# Altium PCB Juno_Light_Driver-One Driver.PcbDoc
Units mm, origin at the board's own origin, x right, y up, seen from the top; angles counter-clockwise.
Board outline 60 x 60 mm, 2 copper layers (Top Layer, Bottom Layer); 29 components, 61 nets, 192 pads, 12 vias.
Unrouted connection lines stored in the file: 114.
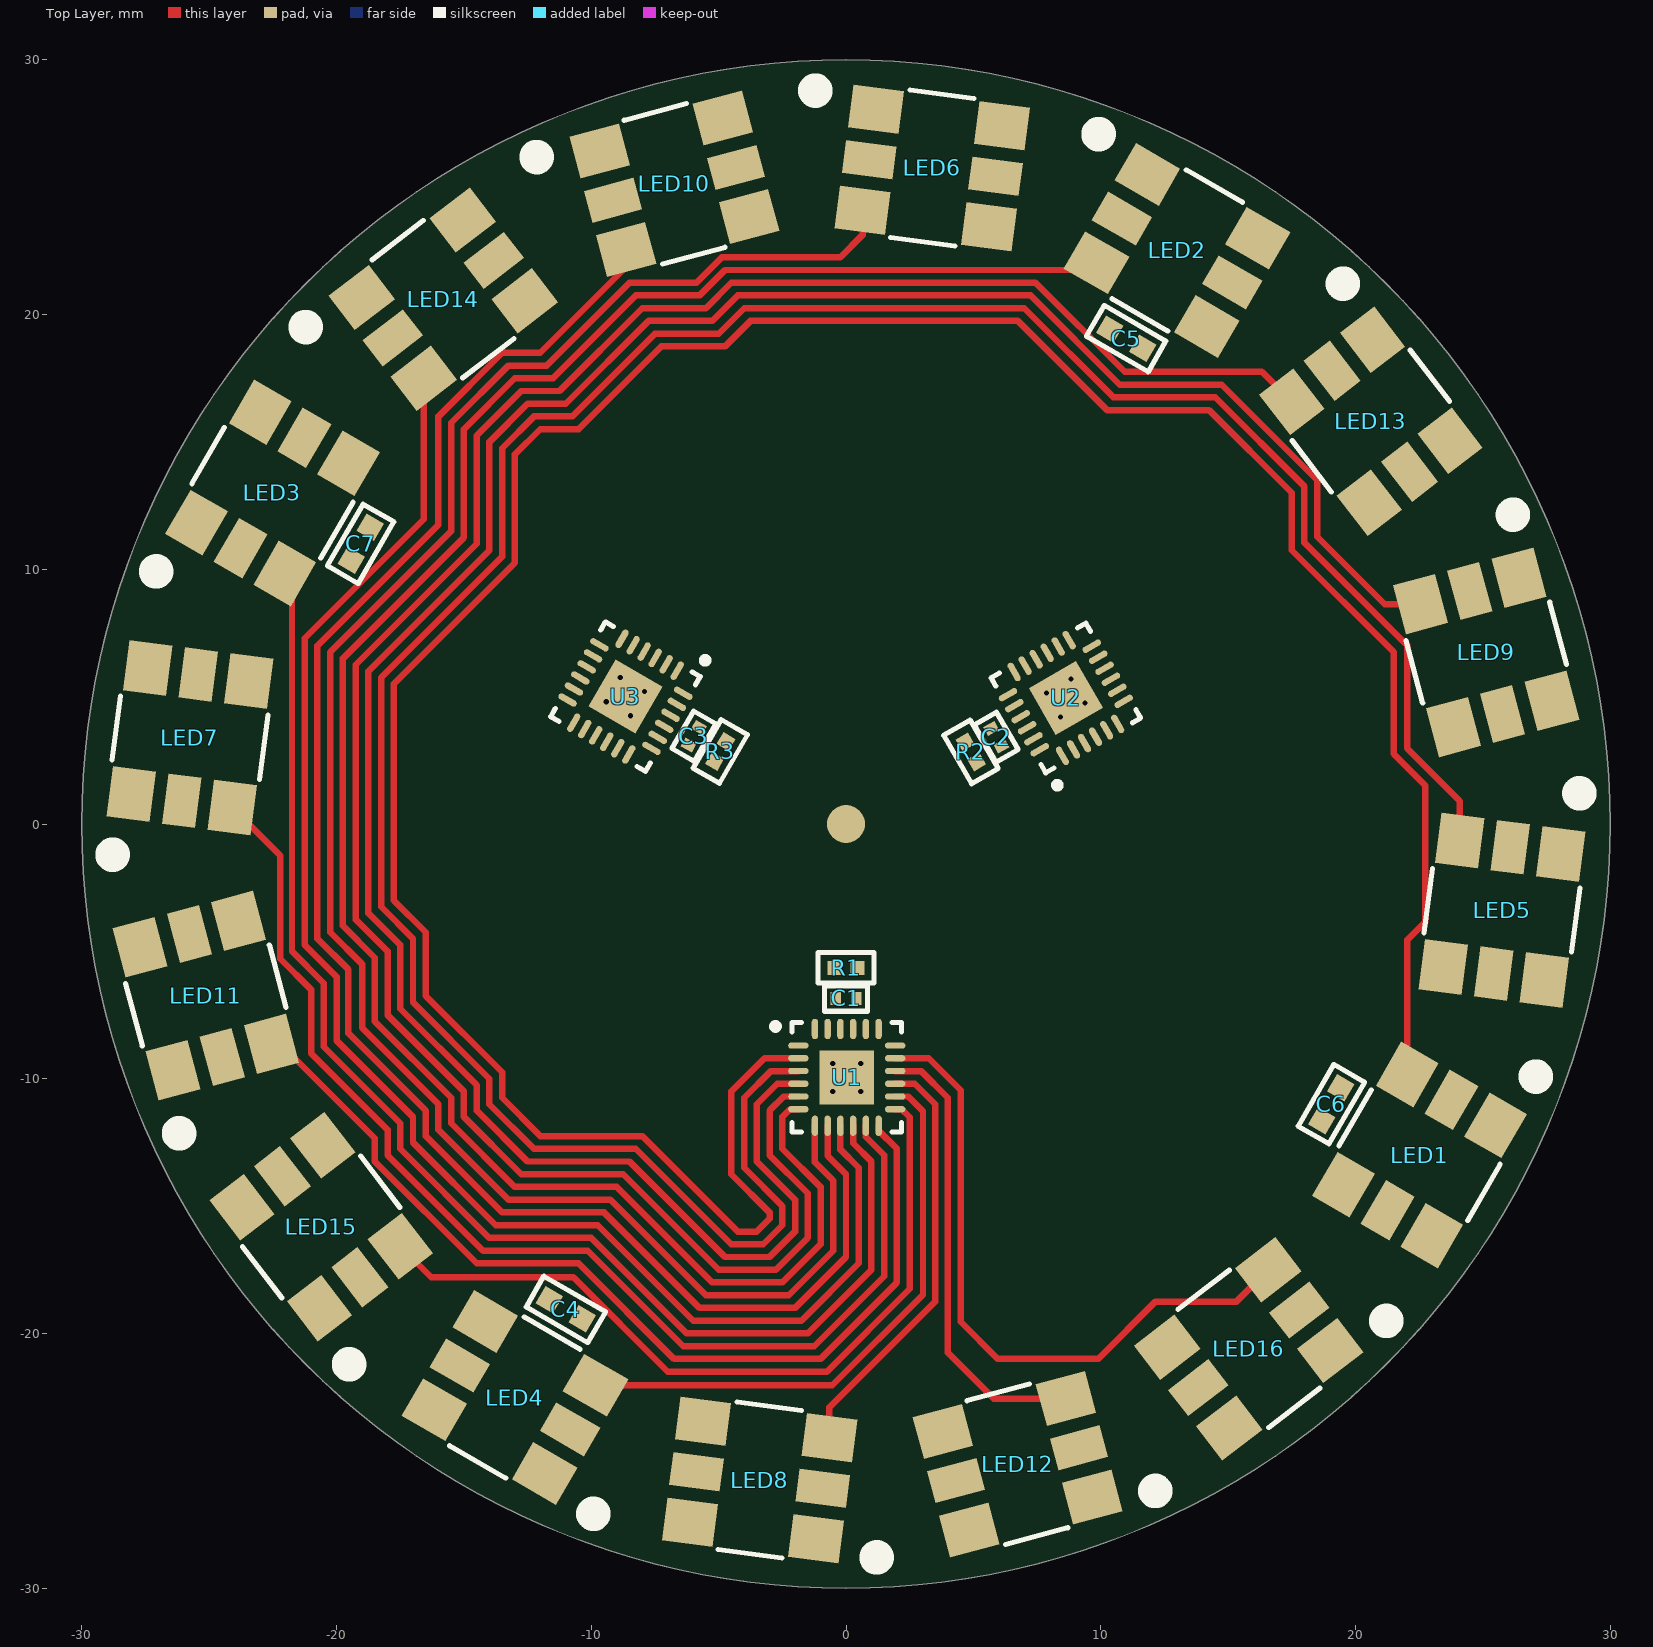
[diagram p0: Top Layer view]
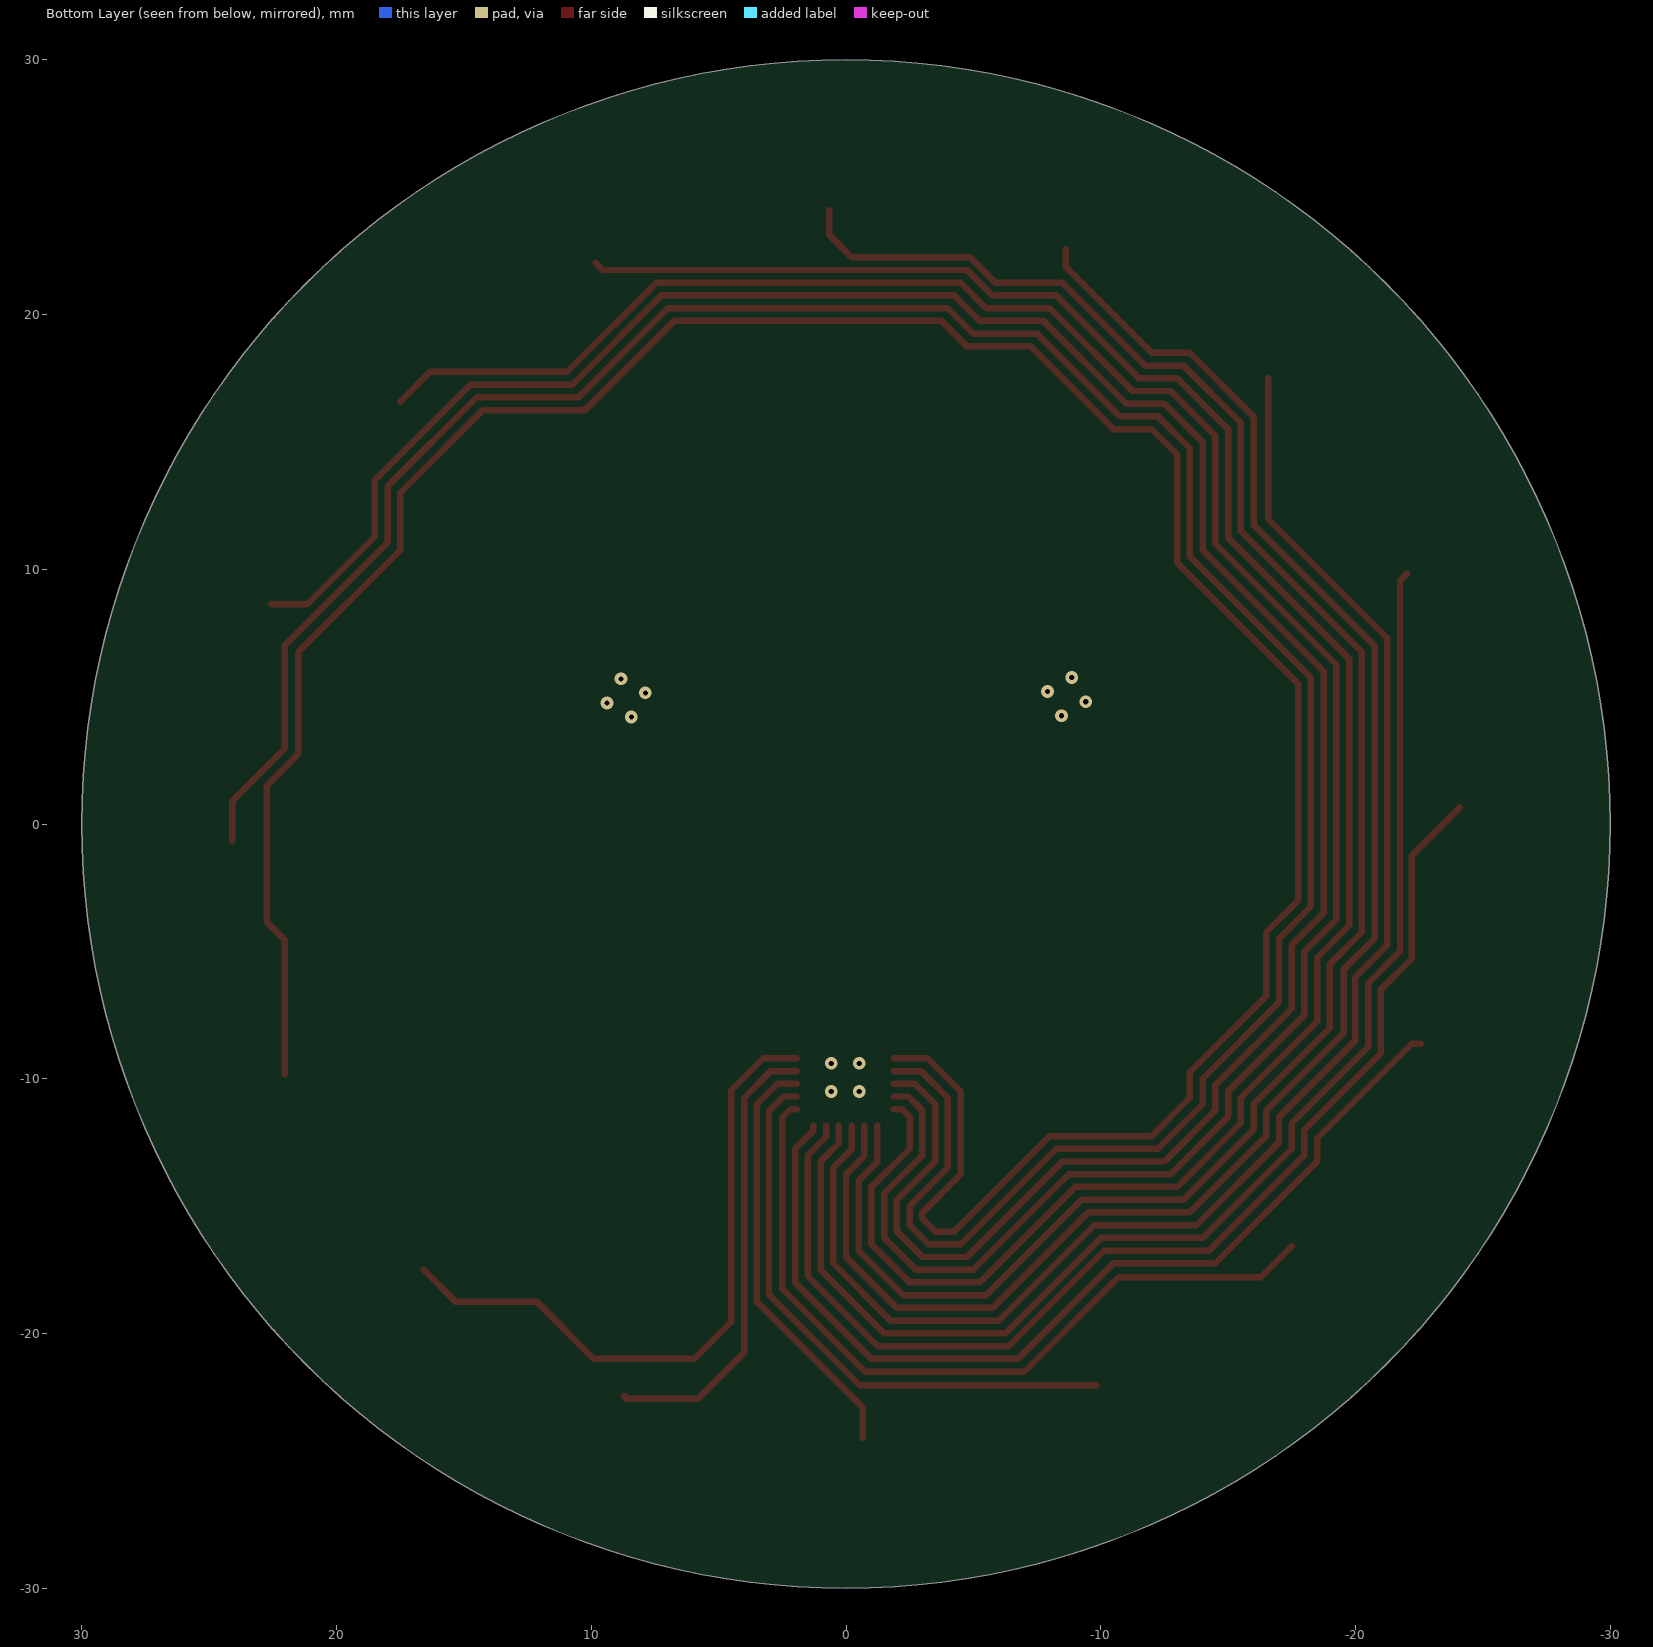
[diagram p1: Bottom Layer view, seen from below]

## Layer stack, top to bottom
Top Solder: solder mask 0.0102, Solder Resist, Dk 3.5
Top Layer: signal copper 0.0356
Dielectric 1: dielectric 0.32, FR-4, Dk 4.8
Bottom Layer: signal copper 0.0356
Bottom Solder: solder mask 0.0102, Solder Resist, Dk 3.5

## Board outline
-30,0 ccw(c0,0) 0,-30 ccw(c0,0) 30,0 ccw(c0,0) 0,30 ccw(c0,0)

## Design rules (kind name [scope] priority, off if disabled: settings)
Clearance [All] p1: gap=0.152 ignorepadtopadclearanceinfootprint=FALSE except(0: Arc-Hole Track-Hole SMDPad-Hole THPad-Hole Via-Hole Fill-Hole Poly-Hole Region-Hole Text-Hole)
MinimumSolderMaskSliver [All] p1 off: minsoldermaskwidth=0.254
PolygonConnect [All] p1: connectstyle=Direct reliefconductorwidth=0.254 reliefentries=4 polygonreliefangle="90 Angle" airgapwidth=0.254
RoutingVias [All] p1: holewidth=0.711 width=1.27 viastyle="Through Hole" minholewidth=0.2 minwidth=0.45 maxholewidth=0.711 maxwidth=1.27
SilkToSilkClearance [All] p1 off: silktosilkclearance=0.254
SilkToSolderMaskClearance [IsPad] p1 off: minsilkscreentomaskgap=0.254 clearancetoexposedcopper=TRUE
SolderMaskExpansion [All] p1: expansion=0.102
Width [All] p1: maxlimit=5.08 minlimit=0.152 preferedwidth=0.254 minimp=50.000000 maximp=50.000000 favimp=50.000000
27 further rules are at their usual default settings.

## Classes and differential pairs
component class "[02] - TRICOLOR LEDS": C4 C5 C6 C7 LED1 LED2 LED3 LED4 LED5 LED6 LED7 LED8 LED9 LED10 LED11 LED12 LED13 LED14 LED15 LED16
component class "[01] - LED DRIVER": C1 C2 C3 R1 R2 R3 U1 U2 U3

## Components (designator, comment, footprint, x,y, rotation, side; value= is the part's Value field where it differs from the comment)
C1 "0.1uF" C0402 0,-6.85 r180 top
C2 "0.1uF" C0402 5.9,3.406 r300 top
C3 "0.1uF" C0402 -5.976,3.45 r60 top
C4 "10uF" C0603 -11,-19.053 r330 top
C5 "10uF" C0603 11,19.053 r150 top
C6 "10uF" C0603 19.053,-11 r60 top
C7 "10uF" C0603 -19.053,11 r240 top
LED1 "SLV6A-FKB-CK1P1G1BB7R3R3" "CREE SLV6A-FKB" 22.517,-13 r240 top
LED2 "SLV6A-FKB-CK1P1G1BB7R3R3" "CREE SLV6A-FKB" 13,22.517 r330 top
LED3 "SLV6A-FKB-CK1P1G1BB7R3R3" "CREE SLV6A-FKB" -22.517,13 r60 top
LED4 "SLV6A-FKB-CK1P1G1BB7R3R3" "CREE SLV6A-FKB" -13,-22.517 r150 top
LED5 "SLV6A-FKB-CK1P1G1BB7R3R3" "CREE SLV6A-FKB" 25.755,-3.391 r262.5 top
LED6 "SLV6A-FKB-CK1P1G1BB7R3R3" "CREE SLV6A-FKB" 3.391,25.755 r352.5 top
LED7 "SLV6A-FKB-CK1P1G1BB7R3R3" "CREE SLV6A-FKB" -25.755,3.391 r82.5 top
LED8 "SLV6A-FKB-CK1P1G1BB7R3R3" "CREE SLV6A-FKB" -3.391,-25.755 r172.5 top
LED9 "SLV6A-FKB-CK1P1G1BB7R3R3" "CREE SLV6A-FKB" 25.135,6.735 r285 top
LED10 "SLV6A-FKB-CK1P1G1BB7R3R3" "CREE SLV6A-FKB" -6.735,25.135 r15 top
LED11 "SLV6A-FKB-CK1P1G1BB7R3R3" "CREE SLV6A-FKB" -25.135,-6.735 r105 top
LED12 "SLV6A-FKB-CK1P1G1BB7R3R3" "CREE SLV6A-FKB" 6.735,-25.135 r195 top
LED13 "SLV6A-FKB-CK1P1G1BB7R3R3" "CREE SLV6A-FKB" 20.609,15.814 r307.5 top
LED14 "SLV6A-FKB-CK1P1G1BB7R3R3" "CREE SLV6A-FKB" -15.814,20.609 r37.5 top
LED15 "SLV6A-FKB-CK1P1G1BB7R3R3" "CREE SLV6A-FKB" -20.609,-15.814 r127.5 top
LED16 "SLV6A-FKB-CK1P1G1BB7R3R3" "CREE SLV6A-FKB" 15.814,-20.609 r217.5 top
R1 "18K" R0402 0,-5.65 r0 top
R2 "18K" R0402 4.9,2.829 r120 top
R3 "18K" R0402 -4.936,2.85 r240 top
U1 "LED1642GWQTR" QFN24 0.03,-9.948 r0 top
U2 "LED1642GWQTR" QFN24 8.63,4.948 r120 top
U3 "LED1642GWQTR" QFN24 -8.66,5 r240 top

## Footprints (in the part's own frame and the unit in brackets; to place one, negate y for a bottom-side part, rotate by r counter-clockwise, add the part's x,y. Pads: shape width x height; smd on the part's side, far side on the other; paste and mask are expansions set on the pad)
C0402 [mm] "Chip Capacitor, 2-Leads, Body 1.00x0.50mm, IPC Medium Density"
  rect 0.4x0.5 smd: 1(-0.4,0) 2(0.4,0)
  silkscreen extent -0.85,-0.5 0.85,0.5, body extent -0.52,-0.27 0.53,0.28, height 0.55
C0603 [mm] "Chip Capacitor, 2-Leads, Body 1.60x0.80mm, IPC Medium Density"
  rect 0.8x0.8 smd: 1(-0.75,0) 2(0.75,0)
  silkscreen extent -1.4,-0.7 1.4,0.7, body extent -0.85,-0.45 0.85,0.45, height 0.9
"CREE SLV6A-FKB" [mm]
  rect 2x1.7 smd: 1(-2.5,2) 3(-2.5,-2) 4(2.5,-2) 6(2.5,2)
  rect 2x1.3 smd: 2(-2.5,0) 5(2.5,0)
  silkscreen extent -5.13,-2.92 1.27,2.92, body extent -2.8,-2.8 2.8,2.8, height 2.6
QFN24 [mm] "QFN, 24-Leads, Body 3.93x3.93mm, Pitch 0.50mm, Thermal Pad 2.13x2.13mm, IPC High Density"
  oval 0.8x0.25 smd: 1(-1.9,1.25) 2(-1.9,0.75) 3(-1.9,0.25) 4(-1.9,-0.25) 5(-1.9,-0.75) 6(-1.9,-1.25) 13(1.9,-1.25) 14(1.9,-0.75) 15(1.9,-0.25) 16(1.9,0.25) 17(1.9,0.75) 18(1.9,1.25)
  oval 0.25x0.8 smd: 7(-1.25,-1.9) 8(-0.75,-1.9) 9(-0.25,-1.9) 10(0.25,-1.9) 11(0.75,-1.9) 12(1.25,-1.9) 19(1.25,1.9) 20(0.75,1.9) 21(0.25,1.9) 22(-0.25,1.9) 23(-0.75,1.9) 24(-1.25,1.9)
  rect 2.13x2.13 smd: 25(0,0)
  silkscreen extent -2.92,-2.15 2.15,2.15, body extent -2.05,-2.05 2.05,2.05, height 1
R0402 [mm] "Chip Resistor, 2-Leads, Body 1.00x0.50mm, IPC Medium Density"
  rect 0.55x0.55 smd: 1(-0.45,0) 2(0.45,0)
  silkscreen extent -1.1,-0.6 1.1,0.6, body extent -0.53,-0.28 0.53,0.28, height 0.4

## Part data
C1 C2 C3: library part CL05B104KO5NNNC, "Cap Ceramic 0.1uF 16V X7R 10% SMD 0402 125C C/T", Capacitance=100nF, Case/Package=0402, Case Code (Metric)=1005, Dielectric=X7R, Manufacturer 1=Samsung, Max Operating Temperature=125°C, Min Operating Temperature=-55°C, Package Quantity=1, Supplier Part Number 1=1276-1001-6-ND, Tolerance=10%, Voltage=16V, Case Code (Imperial)=0402, ComponentLink1Description=https://datasheet.ciiva.com/16208/cl05b104kq5nnnc-16208343.pdf, ComponentLink1URL=https://datasheet.ciiva.com/16208/cl05b104kq5nnnc-16208343.pdf, ComponentLink2Description=https://datasheet.ciiva.com/26920/getdatasheetpartid-359683-26920169.pdf, ComponentLink2URL=https://datasheet.ciiva.com/26920/getdatasheetpartid-359683-26920169.pdf, ComponentLink3Description=https://datasheet.ciiva.com/26309/mlcc-catalogdownload2013-eng-26309003.pdf, ComponentLink3URL=https://datasheet.ciiva.com/26309/mlcc-catalogdownload2013-eng-26309003.pdf, ComponentLink4Description=https://datasheet.ciiva.com/29198/458718-da-01-en-vs-kondensator-0402-29198423.pdf, ComponentLink4URL=https://datasheet.ciiva.com/29198/458718-da-01-en-vs-kondensator-0402-29198423.pdf, Contact Plating=Tin, Depth=0.5mm, Description 1="Cap Ceramic 0.1uF 16V X7R 10% SMD 0402 125C Paper T/R", Height=0.5mm, Lead Free="Lead Free", Length=1mm, Manufacturer Part Number 1=CL05B104KO5NNNC, Material=Ceramic, Mount="Surface Mount", Packaging="Tape and Reel", Pricing 1="1=0.1, 10=0.018, 100=0.0081, 500=0.0058, 1000=0.0045, 2500=0.0041, 5000=0.0038 (USD)", Radiation Hardening=No, Stock 1=9531, Supplier 1=Digi-Key, Thickness=0.022inch, Voltage Rating=16V, Voltage Rating (DC)=16V, Width=0.02inch
C4 C5 C6 C7: library part GRM188R61A106KE69D, "Cap Ceramic 10uF 10V X5R 10% SMD 0603 85C Paper T/R", Case/Package=0603, Case Code (Metric)=1608, Dielectric=X5R, Manufacturer=Murata, Max Operating Temperature=85°C, Min Operating Temperature=-55°C, Supplier Part Number 1=490-10474-1-ND, Tolerance=10%, Voltage=10V, Capacitance=10uF, Case Code (Imperial)=0603, Depth=0.8mm, Description 1="Cap Ceramic 10uF 10V X5R 10% SMD 0603 85C Paper T/R", Height=0.8mm, Lead Free="Lead Free", Length=1.6mm, Manufacturer Part Number 1=GRM188R61A106KE69D, Mount="Surface Mount", Packaging="Tape and Reel", Pricing="1=0.22, 10=0.149, 100=0.0754, 500=0.05158, 1000=0.04563 (USD)", REACH SVHC="No SVHC", Stock=40000, Supplier 1=Digi-Key, Thickness=0.037inch, Voltage Rating=10V, Voltage Rating (DC)=10V, Width=0.031inch
LED1 LED2 LED3 LED4 LED5 LED6 LED7 LED8 LED9 LED10 LED11 LED12 LED13 LED14 LED15 LED16: "LED RGB 6PLCC SMD", Case/Package=SMD/SMT, Color=Blue,Green,Red, Forward Voltage=3.2V, Manufacturer=Cree, Supplier Part Number 1=SLV6A-FKB-CK1P1G1BB7R3R3CT-ND, Test Current=20mA, Dominant Wavelength=470nm, Height=2.6mm, Length=5.5mm, Luminous Intensity=420mcd, Manufacturer Part Number=SLV6A-FKB-CK1P1G1BB7R3R3, Mount="Surface Mount", Packaging="Tape and Reel", Pricing 1="1=0.42, 10=0.395, 100=0.3648, 1000=0.32631 (USD)", Stock 1=101474, Supplier 1=Digi-Key, Width=5.3mm
R1 R2 R3: library part CRGCQ0402F18K, Manufacturer="TE Connectivity", Supplier Part Number 1=A129642CT-ND, Manufacturer Part Number=CRGCQ0402F18K, Pricing 1="1=0.1, 10=0.022, 100=0.009, 1000=0.00406, 2500=0.00352, 5000=0.00291 (USD)", Stock 1=128806, Supplier 1=Digi-Key
U1 U2 U3: "IC LED DRIVER LIN DIM 40MA 24QFN", Case/Package=QFN, Frequency=30MHz, Manufacturer=STMicroelectronics, Max Input Voltage=5.5V, Max Operating Temperature=85°C, Max Output Current=50mA, Max Output Voltage=19V, Max Supply Current=10mA, Min Input Voltage=3V, Min Operating Temperature=-40°C, Nominal Input Voltage (DC)=3.3V, Output Current per Channel=40mA, Package Quantity=4000, Supplier Part Number 1=497-14029-1-ND, ComponentLink1Description=http://www.st.com/content/ccc/resource/technical/document/datasheet/ae/9b/e2/7c/7d/66/41/08/DM00080246.pdf/files/DM00080246.pdf/jcr:content/translations/en.DM00080246.pdf?src-supplier=Digi-Key, ComponentLink1URL=http://www.st.com/content/ccc/resource/technical/document/datasheet/ae/9b/e2/7c/7d/66/41/08/DM00080246.pdf/files/DM00080246.pdf/jcr:content/translations/en.DM00080246.pdf?src-supplier=Digi-Key, ComponentLink2Description=https://www.verical.com/server-webapp/html/getDatasheet?partID=789956&src-supplier=Verical, ComponentLink2URL=https://www.verical.com/server-webapp/html/getDatasheet?partID=789956&src-supplier=Verical, ComponentLink3Description=http://www.st.com/web/en/resource/technical/document/datasheet/DM00080246.pdf?src-supplier=Avnet, ComponentLink3URL=http://www.st.com/web/en/resource/technical/document/datasheet/DM00080246.pdf?src-supplier=Avnet, Dimming=PWM, Height=0.95mm, Lead Free="Lead Free", Length=4.15mm, Manufacturer Part Number=LED1642GWQTR, Max Input Voltage (DC)=5.5V, Max Supply Voltage=5.5V, Min Input Voltage (DC)=3V, Min Supply Voltage=3V, Mount="Surface Mount", Nominal Supply Current=10mA, Number of Channels=16, Number of Outputs=16, Number of Pins=24, Operating Supply Voltage=3.3V, Output Current=50mA, Output Voltage=19V, Packaging="Tape and Reel", Pricing 1="1=2.1, 10=1.883, 100=1.5138, 500=1.24372, 1000=1.03052 (USD)", Radiation Hardening=No, REACH SVHC="No SVHC", Stock 1=43999, Supplier 1=Digi-Key, Switching Frequency=30MHz, Width=4.15mm

## Free pads (board coordinates)
  round 1.5 smd: 9(0,0)

## Via types
v1: diameter 0.5, hole 0.2, Top Layer to Bottom Layer, 12 vias

## Nets (pads, with @x,y where several pads share a name; then routed paths per layer and width w, separated by ;. In a path a pad name is that pad's centre, name@x,y a point inside that pad or via, vN(x,y) a via of type N, cw(c..) or ccw(c..) an arc to the next point about the centre after c; other vN are vias at no path point)
+3V3: C1.1 C2.1 C3.1 U1.21 U2.21 U3.21
+VBATT: C4.1 C5.1 C6.1 C7.1 LED1.4 LED1.5 LED1.6 LED2.4 LED2.5 LED2.6 LED3.4 LED3.5 LED3.6 LED4.4 LED4.5 LED4.6 LED5.4 LED5.5 LED5.6 LED6.4 LED6.5 LED6.6 LED7.4 LED7.5 LED7.6 LED8.4 LED8.5 LED8.6 LED9.4 LED9.5 LED9.6 LED10.4 LED10.5 LED10.6 LED11.4 LED11.5 LED11.6 LED12.4 LED12.5 LED12.6 LED13.4 LED13.5 LED13.6 LED14.4 LED14.5 LED14.6 LED15.4 LED15.5 LED15.6 LED16.4 LED16.5 LED16.6
CLK: U1.24 U2.24 U3.24
GND: C1.2 C2.2 C3.2 C4.2 C5.2 C6.2 C7.2 R1.1 R2.1 R3.1 U1.22 U1.25 U2.22 U2.25 U3.22 U3.25
  other v1: -0.52,-10.498 0.58,-10.498 -0.52,-9.398 0.58,-9.398 8.429,4.197 -8.459,4.249 9.381,4.747 -9.412,4.799 7.879,5.149 -7.909,5.201 8.831,5.699 -8.862,5.751
LE: U1.1 U2.1 U3.1
NetR1_2: R1.2 U1.20
NetR2_2: R2.2 U2.20
NetR3_2: R3.2 U3.20
NetU1_19: U1.19 U2.23
NetU2_19: U2.19 U3.23
OUTB0: LED1.1 U3.2
OUTB1: LED5.1 U3.3
OUTB2: LED9.1 U3.4
OUTB3: LED13.1 U3.5
OUTB4: LED2.1 U3.6
OUTB5: LED6.1 U3.7
OUTB6: LED10.1 U3.8
OUTB7: LED14.1 U3.9
OUTB8: LED3.1 U3.10
OUTB9: LED7.1 U3.11
OUTB10: LED11.1 U3.12
OUTB11: LED15.1 U3.13
OUTB12: LED4.1 U3.14
OUTB13: LED8.1 U3.15
OUTB14: LED12.1 U3.16
OUTB15: LED16.1 U3.17
OUTG0: LED1.2 U2.2
OUTG1: LED5.2 U2.3
OUTG2: LED9.2 U2.4
OUTG3: LED13.2 U2.5
OUTG4: LED2.2 U2.6
OUTG5: LED6.2 U2.7
OUTG6: LED10.2 U2.8
OUTG7: LED14.2 U2.9
OUTG8: LED3.2 U2.10
OUTG9: LED7.2 U2.11
OUTG10: LED11.2 U2.12
OUTG11: LED15.2 U2.13
OUTG12: LED4.2 U2.14
OUTG13: LED8.2 U2.15
OUTG14: LED12.2 U2.16
OUTG15: LED16.2 U2.17
OUTR0: LED1.3 U1.2 | length 111.4
  Top Layer w0.254: U1.2 -3.198,-9.198 -4.5,-10.5 -4.5,-13.75 -3,-15.25 -3,-15.5 -3.5,-16 -4.25,-16 -8,-12.25 -12,-12.25 -13.5,-10.75 -13.5,-9.75 -16.5,-6.75 -16.5,-4.25 -17.75,-3 -17.75,5.5 -13,10.25 -13,14.509 -12.009,15.5 -10.5,15.5 -7.25,18.75 -4.75,18.75 -3.75,19.75 6.75,19.75 10.25,16.25 14.25,16.25 17.5,13 17.5,10.75 21.5,6.75 21.5,2.75 22.75,1.5 22.75,-3.838 22.035,-4.553 LED1.3
OUTR1: LED5.3 U1.3 | length 104.9
  Top Layer w0.254: U1.3 -2.948,-9.698 -4,-10.75 -4,-13.5 -2.5,-15 -2.5,-15.75 -3.25,-16.5 -4.5,-16.5 -8.25,-12.75 -12.251,-12.75 -14.001,-11 -14.001,-9.999 -17,-7 -17,-4.5 -18.25,-3.25 -18.25,5.75 -13.5,10.5 -13.5,14.75 -12.25,16 -10.75,16 -7.5,19.25 -5,19.25 -4,20.25 7,20.25 10.5,16.75 14.5,16.75 18,13.25 18,11.045 22.035,7.01 22.035,2.965 24.099,0.901 LED5.3
OUTR2: LED9.3 U1.4 | length 98.1
  Top Layer w0.254: U1.4 -2.698,-10.198 -3.5,-11 -3.5,-13.25 -2,-14.75 -2,-16 -3,-17 -4.75,-17 -8.5,-13.25 -12.5,-13.25 -14.5,-11.25 -14.5,-10.25 -17.501,-7.249 -17.501,-4.749 -18.75,-3.5 -18.75,6 -14,10.75 -14,15 -12.5,16.5 -11,16.5 -7.75,19.75 -5.25,19.75 -4.25,20.75 7.25,20.75 10.75,17.25 14.75,17.25 18.5,13.5 18.5,11.278 21.146,8.632 LED9.3
OUTR3: LED13.3 U1.5 | length 90.4
  Top Layer w0.254: U1.5 -2.448,-10.698 -3,-11.25 -3,-13 -1.5,-14.5 -1.5,-16.25 -2.751,-17.501 -4.999,-17.501 -8.75,-13.75 -12.751,-13.75 -15,-11.501 -15,-10.5 -18,-7.5 -18,-5 -19.25,-3.75 -19.25,6.25 -14.5,11 -14.5,15.25 -12.75,17 -11.25,17 -8,20.25 -5.5,20.25 -4.5,21.25 7.44,21.25 10.94,17.75 16.331,17.75 LED13.3
OUTR4: LED2.3 U1.6 | length 82.6
  Top Layer w0.254: U1.6 -2.198,-11.198 -2.5,-11.5 -2.5,-12.75 -1,-14.25 -1,-16.5 -2.5,-18 -5.25,-18 -9,-14.25 -12.999,-14.25 -15.5,-11.749 -15.5,-10.75 -18.5,-7.75 -18.5,-5.25 -19.75,-4 -19.75,6.5 -15,11.25 -15,15.5 -13,17.5 -11.5,17.5 -8.25,20.75 -5.75,20.75 -4.75,21.75 9.55,21.75 LED2.3
OUTR5: LED6.3 U1.7 | length 75.8
  Top Layer w0.254: U1.7 -1.22,-13.28 -0.5,-14 -0.5,-16.75 -2.25,-18.5 -5.5,-18.5 -9.25,-14.75 -13.25,-14.75 -16,-12 -16,-11 -19,-8 -19,-5.5 -20.25,-4.25 -20.25,6.75 -15.5,11.5 -15.5,15.75 -13.25,18 -11.75,18 -8.5,21.25 -5.869,21.25 -4.869,22.25 -0.22,22.25 0.651,23.121 LED6.3
OUTR6: LED10.3 U1.8 | length 68
  Top Layer w0.254: LED10.3 -8.632,21.877 -12.009,18.5 -13.5,18.5 -16,16 -16,11.75 -20.75,7 -20.75,-4.5 -19.535,-5.715 -19.535,-8.215 -16.5,-11.25 -16.5,-12.25 -13.5,-15.25 -9.5,-15.25 -5.75,-19 -2,-19 0,-17 0,-13.75 -0.72,-13.03 U1.8
OUTR7: LED14.3 U1.9 | length 60.7
  Top Layer w0.254: LED14.3 -16.58,11.968 -21.25,7.297 -21.25,-4.75 -20,-6 -20,-8.5 -17,-11.5 -17,-12.5 -13.75,-15.75 -9.75,-15.75 -6,-19.5 -1.75,-19.5 0.5,-17.25 0.5,-13.5 -0.22,-12.78 U1.9
OUTR8: LED3.3 U1.10 | length 53
  Top Layer w0.254: LED3.3 -21.75,9.55 -21.75,-5 -20.5,-6.25 -20.5,-8.75 -17.501,-11.749 -17.501,-12.75 -14.001,-16.25 -10,-16.25 -6.25,-20 -1.5,-20 1,-17.5 1,-13.25 0.28,-12.53 U1.10
OUTR9: LED7.3 U1.11 | length 46.1
  Top Layer w0.254: LED7.3 -22.207,-1.241 -22.207,-5.293 -21,-6.5 -21,-9 -18,-12 -18,-13.001 -14.251,-16.75 -10.14,-16.75 -6.39,-20.5 -1.25,-20.5 1.5,-17.75 1.5,-13.001 0.78,-12.281 U1.11
OUTR10: LED11.3 U1.12 | length 37.9
  Top Layer w0.254: LED11.3 -22.207,-8.632 -18.5,-12.339 -18.5,-13.25 -14.5,-17.25 -10.5,-17.25 -6.75,-21 -1,-21 2,-18 2,-12.75 1.28,-12.03 U1.12
OUTR11: LED15.3 U1.13 | length 30.8
  Top Layer w0.254: LED15.3 -16.283,-17.797 -10.703,-17.797 -7,-21.5 -0.75,-21.5 2.5,-18.25 2.5,-11.518 2.18,-11.198 U1.13
OUTR12: LED4.3 U1.14 | length 22.9
  Top Layer w0.254: LED4.3 -0.535,-22.035 3.023,-18.477 3.023,-11.273 2.448,-10.698 U1.14
OUTR13: LED8.3 U1.15 | length 16.7
  Top Layer w0.254: LED8.3 -0.651,-22.901 3.5,-18.75 3.5,-11 2.698,-10.198 U1.15
OUTR14: LED12.3 U1.16 | length 18
  Top Layer w0.254: U1.16 2.948,-9.698 4,-10.75 4,-20.75 5.806,-22.556 LED12.3 ; LED12.3@8.632,-22.469 LED12.3@8.719,-22.469
OUTR15: LED16.3 U1.17 | length 26.3
  Top Layer w0.254: U1.17 3.25,-9.198 4.5,-10.448 4.5,-19.544 5.956,-21 9.901,-21 12.151,-18.75 15.331,-18.75 LED16.3
PWCLK: U1.18 U2.18 U3.18
SDI: U1.23
SDO: U3.19

## Silkscreen, mask and mechanical layers (free items; w line width, h text height)
Mechanical 1:
  circle w1: c0,0 r30
Mechanical 2:
  lines w0.406: -30,0 30,0 ; -27.716,-11.481 27.716,11.481 ; -27.716,11.481 27.716,-11.481 ; -21,-21 21,21 ; -21,21 21,-21 ; -11.481,-27.716 11.481,27.716 ; -11.481,27.716 11.481,-27.716 ; 0,-30 0,30
Mechanical 3:
  lines w0.406: -25.981,-15 0,0 ; 0,30 0,0 ; 25.981,-15 0,0
Mechanical 4:
  lines w0.406: -30,0 30,0 ; 0,-30 0,30